# Altium PCB fastedge-ADCMP572.PcbDoc
Units mil, origin at the board's own origin, x right, y up, seen from the top; angles counter-clockwise.
Board outline 787.4 x 866.14 mil, 4 copper layers (L1, L2, L3, L4), stack 62.417 mil thick; 30 components, 17 nets, 105 pads, 140 vias.
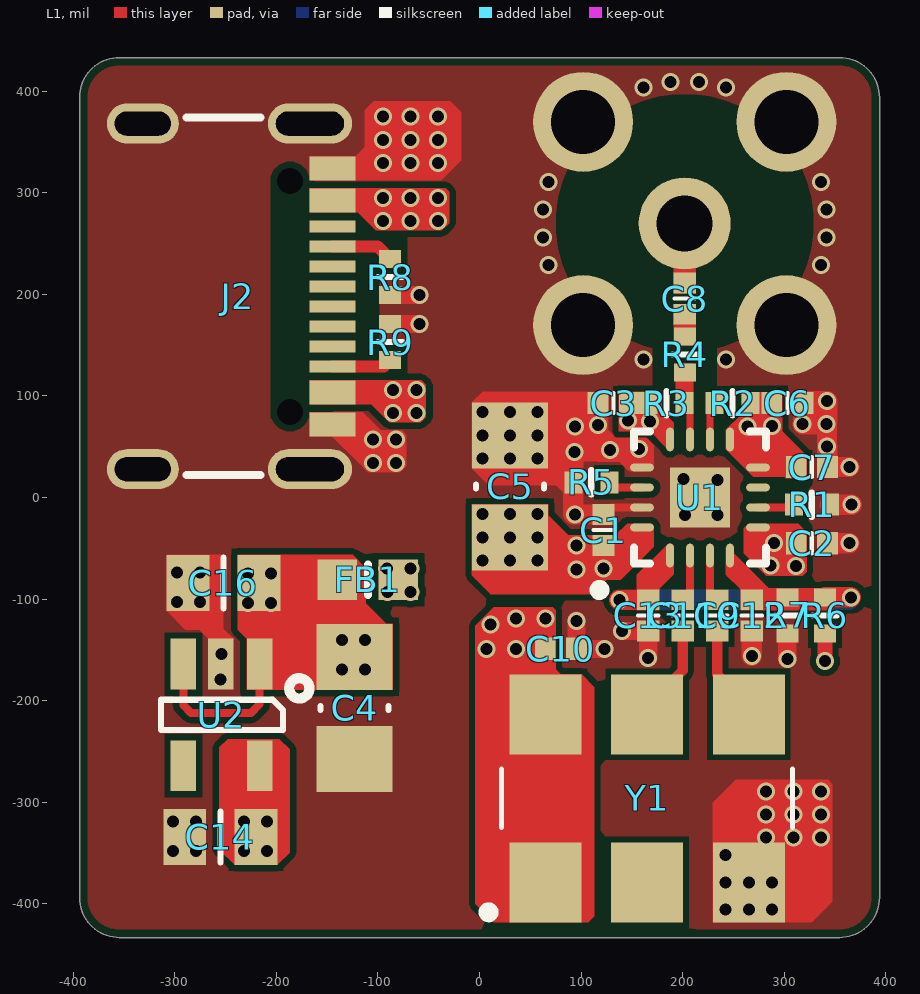
[diagram p0: L1 view]
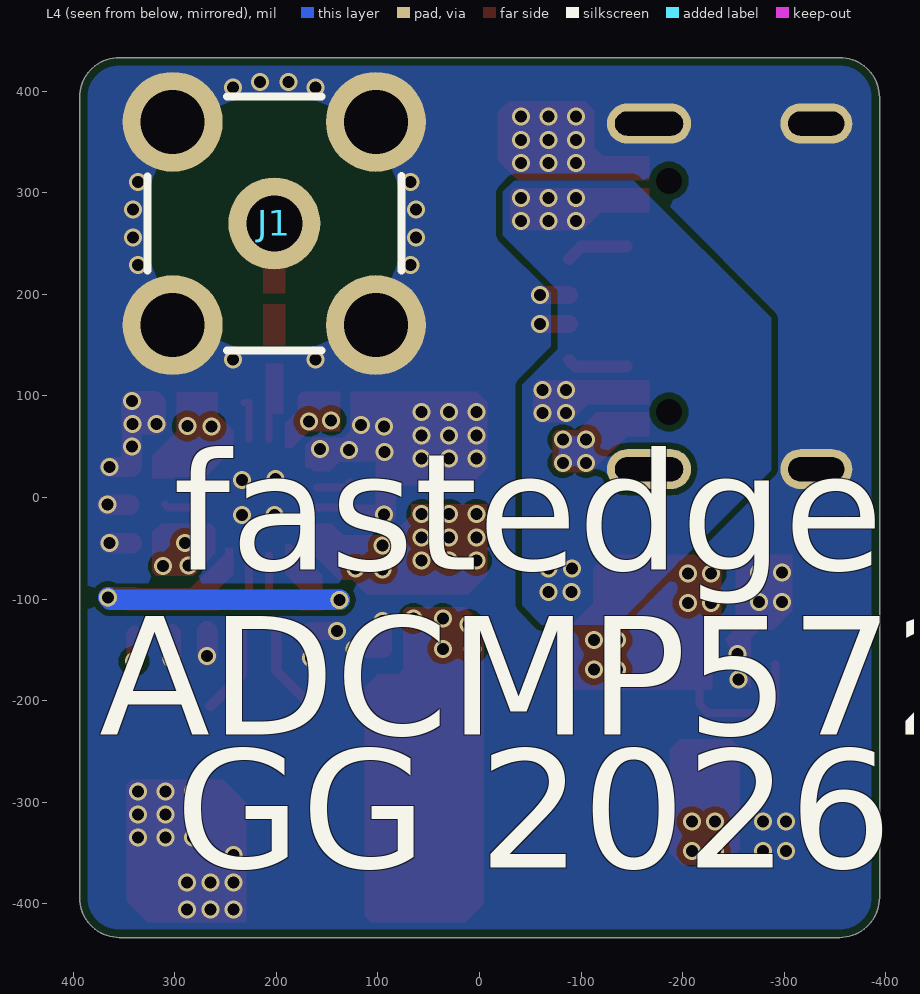
[diagram p1: L4 view, seen from below]
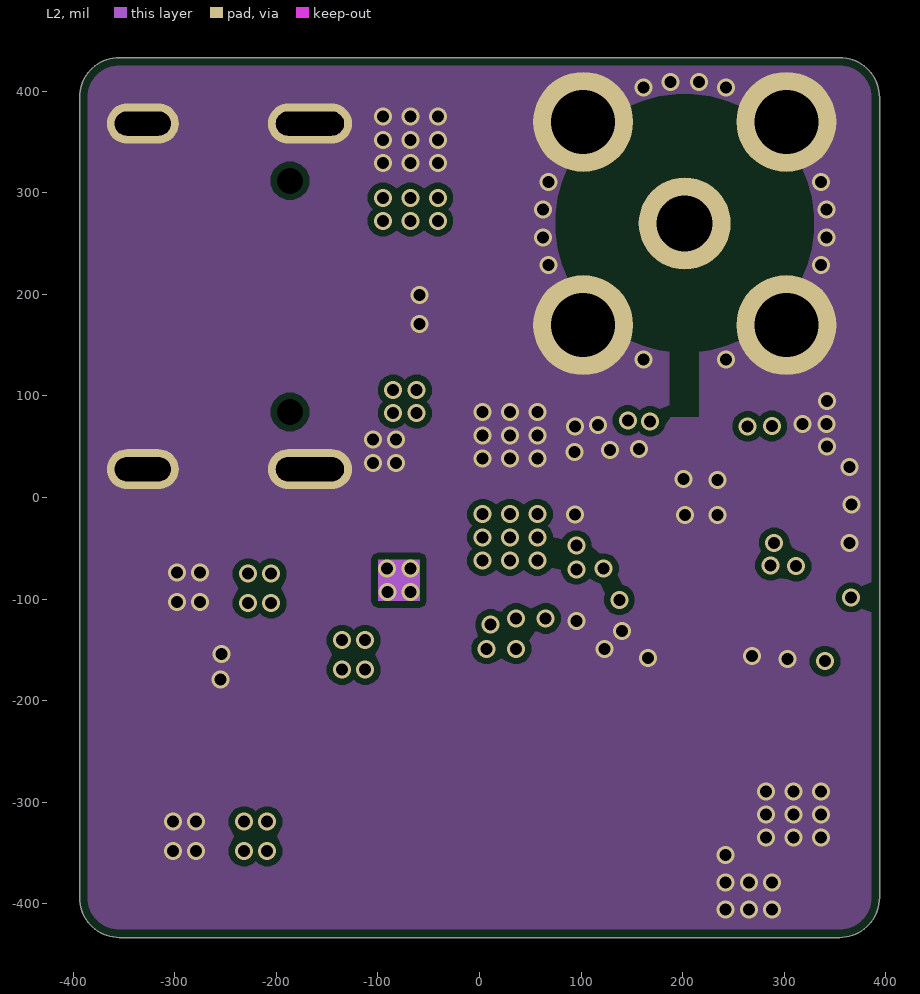
[diagram p2: L2]
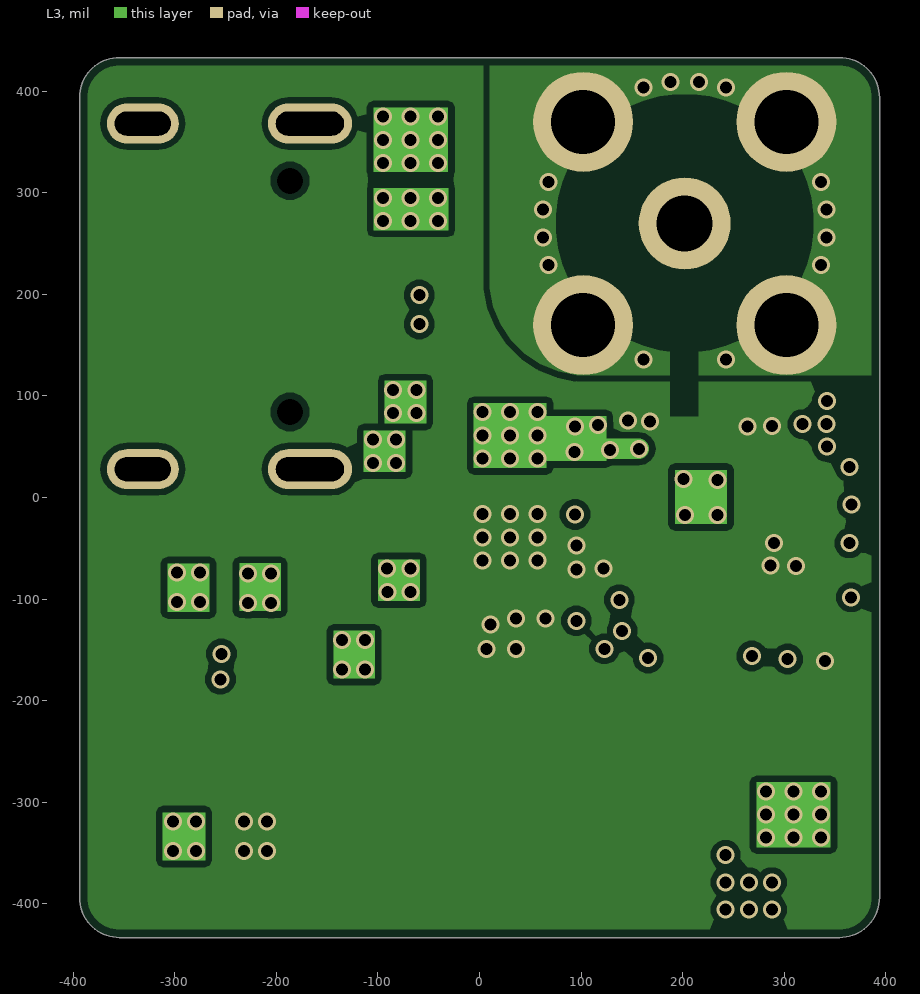
[diagram p3: L3]
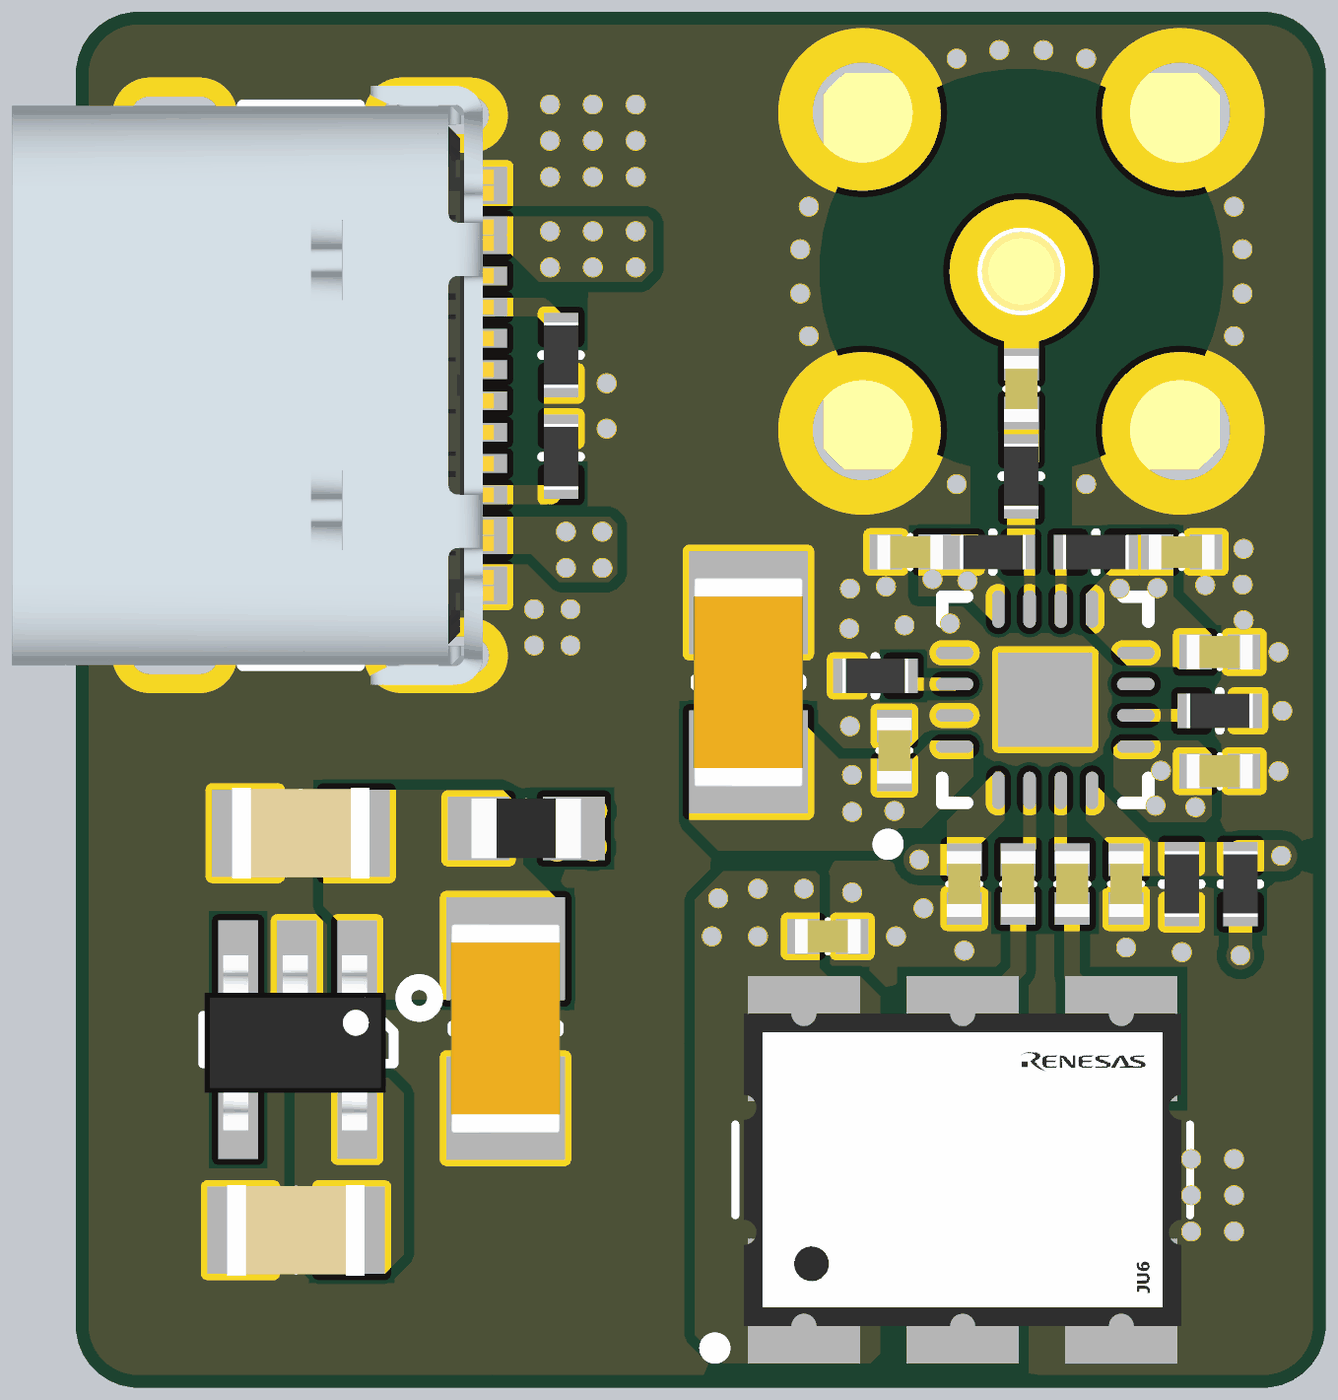
[diagram p4: 3D render of the assembled board from above, using the file's embedded part models]

## Layer stack, top to bottom
Top Solder: solder mask 0.4, Solder Resist, Dk 3.5
L1: signal copper 1.378
Dielectric 2: prepreg 8.2677, PP-006, Dk 4.1
L2: signal copper 0.5984
Dielectric 1: dielectric 41.9291, FR-4, Dk 4.8
L3: signal copper 0.5984
Dielectric 3: prepreg 8.2677, PP-006, Dk 4.1
L4: signal copper 1.378
Bottom Solder: solder mask 0.4, Solder Resist, Dk 3.5

## Board outline
-354.33,-433.07 cw(c-354.33,-393.7) -393.7,-393.7 -393.7,393.7 cw(c-354.33,393.7) -354.33,433.07 354.33,433.07 cw(c354.33,393.7) 393.7,393.7 393.7,-393.7 cw(c354.33,-393.7) 354.33,-433.07

## Design rules (kind name [scope] priority, off if disabled: settings)
BoardOutlineClearance [All] p1: gap=7.87 ignorepadtopadclearanceinfootprint=FALSE
Clearance [All] p1: gap=6 ignorepadtopadclearanceinfootprint=TRUE
HoleSize [All] p1: absolutevalues=TRUE maxlimit=157.48 minlimit=11.81 maxpercent=80.000 minpercent=20.000
MinimumAnnularRing [All] p1: minimumring=1.97
MinimumSolderMaskSliver [All] p1: minsoldermaskwidth=2
PlaneConnect [All] p1: planeconnectstyle=Direct reliefexpansion=20 reliefentries=4 reliefconductorwidth=10 reliefairgap=10
PolygonConnect VIA [IsVia] p1: connectstyle=Direct reliefconductorwidth=10 reliefentries=4 polygonreliefangle="90 Angle" airgapwidth=10
PolygonConnect [All] p2: connectstyle=Direct reliefconductorwidth=30 reliefentries=4 polygonreliefangle="90 Angle" airgapwidth=15
RoutingVias [All] p1: holewidth=11.81 width=17.72 viastyle="Through Hole" minholewidth=11.81 minwidth=17.72 maxholewidth=11.81 maxwidth=17.72
SilkToSilkClearance [All] p1: silktosilkclearance=1
SilkToSolderMaskClearance [IsPad] p1: minsilkscreentomaskgap=1 clearancetoexposedcopper=TRUE
SolderMaskExpansion [All] p1: expansion=4 istentingtop=FALSE
SupplyNets "Schematic Supply Nets_3" [InNet('+3.3V')] p1: voltage=0.000
SupplyNets "Schematic Supply Nets_2" [InNet('GND')] p2: voltage=0.000
SupplyNets "Schematic Supply Nets" [InNet('+5V')] p3: voltage=0.000
Width [All] p1: maxlimit=150 minlimit=7 preferedwidth=32 toplayer_prefwidth=10 midlayer1_minwidth=10 midlayer1_maxwidth=100 midlayer2_minwidth=10 midlayer2_maxwidth=100 bottomlayer_prefwidth=10 minimp=50.000000 maximp=50.000000 favimp=50.000000
25 further rules are at their usual default settings.

## Components (designator, comment, footprint, x,y, rotation, side; value= is the part's Value field where it differs from the comment)
C1 "Ceramic X7R" C_0402_1005 122,-32 r90 top value=100nF
C2 "Ceramic X7R" C_0402_1005 327,-45 r0 top value=100nF
C3 "Ceramic X7R" C_0402_1005 132,93 r180 top value=100nF
C4 "Ceramic X5R" C_1206_3216 -123,-207 r270 top value=47uF
C5 "Ceramic X5R" C_1206_3216 30,11 r90 top value=47uF
C6 "Ceramic X7R" C_0402_1005 303,93 r0 top value=100nF
C7 "Ceramic X7R" C_0402_1005 327,30 r0 top value=100nF
C8 "Ceramic X7R" C_0402_1005 202,195.72 r90 top value=100nF
C9 "Ceramic X7R" C_0402_1005 234,-116 r90 top value=100nF
C10 "Ceramic X7R" C_0402_1005 80,-149 r0 top value=100nF
C11 "Ceramic X7R" C_0402_1005 200,-116 r90 top value=100nF
C12 "Ceramic X5R" C_0402_1005 268,-116 r270 top value=10uF
C13 "Ceramic X7R" C_0402_1005 166,-116 r270 top value=100nF
C14 "Ceramic X5R" C_0805_2012 -255,-334 r180 top value=10uF
C16 "Ceramic X5R" C_0805_2012 -252,-84 r180 top value=10uF
FB1 "Ferrite bead" FB_0603_1608 -110,-81 r180 top value=120R@100M
J1 "SMA VERTICAL" J_SMA_VERTICAL 202,269.72 r180 bottom value=901-144-8RFX
J2 "USB 2.0 Type C" J_USB_C_629722000214 -247,198 r270 top locked value=629722000214
R1 "Resistor" R_0402_1005 327,-7 r180 top value=750R
R2 "Resistor" R_0402_1005 249,93 r0 top value=49.9R
R3 "Resistor" R_0402_1005 184,93 r180 top value=75R
R4 "Resistor" R_0402_1005 202,140.72 r90 top value=100R
R5 "Resistor" R_0402_1005 110,15 r180 top value=10k
R6 "Resistor" R_0402_1005 340,-116 r270 top value=5.6k
R7 "Resistor" R_0402_1005 303,-116 r90 top value=1k
R8 "Resistor" R_0402_1005 -88,217 r90 top value=5.1k
R9 "Resistor" R_0402_1005 -88,153 r270 top value=5.1k
U1 "ADCMP572BCPZ-WP" ADI-CP-16-3_L 217,0 r90 top
U2 "LDO Voltage Regulators 300-mA high-PSRR low -IQ low-dropout regu" SOT23-5_SC74A_SOT753_M -254,-214 r180 top value=TLV77333PDBVR
Y1 "XLL736005.000000X" JU6_MFG 165,-296 r90 top

## Footprints (in the part's own frame and the unit in brackets; to place one, negate y for a bottom-side part, rotate by r counter-clockwise, add the part's x,y. Pads: shape width x height; smd on the part's side, far side on the other; paste and mask are expansions set on the pad)
ADI-CP-16-3_L [mm] "QFN, 16-Leads, Body 3x3mm, Pitch 0.5mm, Thermal Pad 1.5x1.5mm, IPC High Density"
  oval 0.6x0.2 smd: 1(-1.45,0.75) 2(-1.45,0.25) 3(-1.45,-0.25) 4(-1.45,-0.75) 9(1.45,-0.75) 10(1.45,-0.25) 11(1.45,0.25) 12(1.45,0.75)
  oval 0.2x0.6 smd: 5(-0.75,-1.45) 6(-0.25,-1.45) 7(0.25,-1.45) 8(0.75,-1.45) 13(0.75,1.45) 14(0.25,1.45) 15(-0.25,1.45) 16(-0.75,1.45)
  rect 1.5x1.5 smd: 17(0,0)
  silkscreen extent -2.44,-1.65 1.65,2.64, body extent -1.5,-1.5 1.5,1.5, height 0.9
C_0402_1005 [mm]
  rect 0.52x0.56 smd: 1(-0.39,0) 2(0.39,0)
  silkscreen extent 0,-0.25 0,0.25, body extent -0.52,-0.27 0.53,0.28, height 0.55
C_0805_2012 [mil]
  rect 42x55 smd: 1(-35,0) 2(35,0)
  silkscreen extent 0,-25 0,25, body extent -43,-29 43,29, height 53
C_1206_3216 [mm] "Chip Capacitor, 2-Leads, Body 3.20x1.60mm, IPC Medium Density"
  rect 1.65x1.9 smd: 1(-1.275,0) 2(1.275,0)
  silkscreen extent -0.05,-0.85 0.05,0.85, body extent -1.68,-0.87 1.68,0.87, height 1.25
FB_0603_1608 [mil]
  rect 39x40 smd: 1(-30,0) 2(30,0)
  silkscreen extent 0,-15 0,15, body extent -34,-19 34,19, height 21
J_SMA_VERTICAL [mm]
  round 2.3 hole 1.4: 1(0,0)
  round 2.5 hole 1.6: GND(-2.54,-2.54) GND(-2.54,2.54) GND(2.54,-2.54) GND(2.54,2.54)
  silkscreen extent -3.17,-3.18 3.18,3.17, body extent -3.17,-3.17 3.18,3.18, height 9.5
J_USB_C_629722000214 [mm]
  rect 0.3x1.15 smd: A1(-3.35,2.6) A4(-2.55,2.6) A5(-1.25,2.6) A6(-0.25,2.6) A7(0.25,2.6) A8(1.25,2.6) A9(2.55,2.6) A12(3.35,2.6) B1(3.05,2.6) B4(2.25,2.6) B5(1.75,2.6) B6(0.75,2.6) B7(-0.75,2.6) B8(-1.75,2.6) B9(-2.25,2.6) B12(-3.05,2.6)
  round 0 hole 0.65 unplated: DNC(-2.89,1.535) DNC(2.89,1.535)
  oval 1x2.1 hole 0.6 slot 1.7 at 90 deg: MH(-4.32,2.035) MH(4.32,2.035)
  oval 1x1.8 hole 0.6 slot 1.4 at 90 deg: MH(-4.32,-2.145) MH(4.32,-2.145)
  silkscreen extent -4.47,-1.05 4.47,0.8, body extent -4.79,-4.74 4.79,2.97, height 3.26
JU6_MFG [mm] "Recommended Land Pattern"
  rect 2x1.8 smd paste+0 mask+0: 1(-2.1,2.54) 2(-2.1,0) 3(-2.1,-2.54) 4(2.1,-2.54) 5(2.1,0) 6(2.1,2.54)
  silkscreen extent -2.97,-3.64 0.72,4.09, body extent -2.5,-3.5 2.5,3.5, height 1.45
R_0402_1005 [mm] "Chip Resistor, 2-Leads, Body 1.00x0.50mm, IPC High Density"
  rect 0.45x0.55 smd: 1(-0.45,0) 2(0.45,0)
  silkscreen extent 0,-0.3 0,0.3, body extent -0.53,-0.28 0.53,0.28, height 0.37
SOT23-5_SC74A_SOT753_M [mil]
  rect 25x50 smd: 1(-37.5,-50) 2(0.5,-50) 3(37.5,-50) 4(37.5,50) 5(-37.5,50)
  silkscreen extent -87,-36 60,15, body extent -56,-53 59,57, height 57

## Part data
C1 C2 C3 C6 C7 C8 C9 C10 C11 C13: library part C_100nF_50V_X7R_0402_10, "Capacitor", Dielectric=X7R, Manufacturer=Murata, Manufacturer Part Number=GRM155R71H104KE14D, Tolerance (%)=10, Voltage=50V, HelpURL=http://docs-europe.electrocomponents.com/webdocs/145f/0900766b8145f9d2.pdf, Part Number=C_100nF_50V_X7R_0402_10, SCH_Footprint=0402, Supplier 1=TME, Supplier 2="RS Components", Supplier 3=Farnell, Supplier 4=Mouser, Supplier 5=Digi-Key, Supplier 6=LCSC, Supplier Part Number 1=GRM155R71H104KE14D, Supplier Part Number 2=8847087, Supplier Part Number 3=2611912, Supplier Part Number 4=81-GRM155R71H104KE4D, Supplier Part Number 5=490-10700-1-ND
C4 C5: library part C_47uF_25V_X5R_1206_20, "Capacitor", Dielectric=X5R, Manufacturer=TDK, Manufacturer Part Number=C3216X5R1E476M160AC, Supplier Part Number 1=C3216X5R1E476MAC, Tolerance (%)=20, Voltage=25V, HelpURL=https://product.tdk.com/system/files/dam/doc/product/capacitor/ceramic/mlcc/catalog/mlcc_commercial_general_en.pdf, Part Number=C_47uF_25V_X5R_1206_20, SCH_Footprint=1206, Supplier 1=TME, Supplier 2="RS Components", Supplier 3=Farnell, Supplier 4=Mouser, Supplier 5=Digi-Key, Supplier 6=LCSC, Supplier Part Number 2=7883060P, Supplier Part Number 3=2525172, Supplier Part Number 4=810-C3216X5R1E476M, Supplier Part Number 5=445-8047-1-ND
C12: library part C_10uF_10V_X5R_0402_20, "Capacitor", Dielectric=X5R, Manufacturer=Murata, Manufacturer Part Number=GRM155R61A106ME11D, Tolerance (%)=20, Voltage=10V, HelpURL=https://search.murata.co.jp/Ceramy/image/img/A01X/G101/ENG/GRM155R61A106ME11-01A.pdf, Part Number=C_10uF_10V_X5R_0402_20, SCH_Footprint=0402, Supplier 1=TME, Supplier 2="RS Components", Supplier 3=Farnell, Supplier 4=Mouser, Supplier 5=Digi-Key, Supplier 6=LCSC, Supplier Part Number 1=GRM155R61A106ME11D, Supplier Part Number 2=260-8765P, Supplier Part Number 3=3785802, Supplier Part Number 4=81-GRM155R61A106ME1D, Supplier Part Number 5=490-GRM155R61A106ME11DCT-ND, Supplier Part Number 6=C408132
C14 C16: library part C_10uF_10V_X5R_0805_10, "Capacitor", Dielectric=X5R, Manufacturer=Kemet, Manufacturer Part Number=C0805C106K8PACTU, Supplier Part Number 1=C0805C106K8PAC, Tolerance (%)=10, Voltage=10V, HelpURL=https://www.mouser.pl/datasheet/2/447/KEM_C1006_X5R_SMD-3316465.pdf, Part Number=C_10uF_10V_X5R_0805_10, SCH_Footprint=0805, Supplier 1=TME, Supplier 2="RS Components", Supplier 3=Farnell, Supplier 4=Mouser, Supplier 5=Digi-Key, Supplier 6=LCSC, Supplier Part Number 2=8029850, Supplier Part Number 3=1463362, Supplier Part Number 4=80-C0805C106K8P, Supplier Part Number 5=399-C0805C106K8PAC7800CT-ND
FB1: library part FB_BLM18AG121SH1D, "Ferrite Bead", Current=800mA, Manufacturer=Murata, Manufacturer Part Number=BLM18AG121SH1D, Resistance=180mR, HelpURL=https://www.murata.com/en-us/api/pdfdownloadapi?cate=cgsubChipFerriBead&partno=BLM18AG121SH1%23, Part Number=FB_BLM18AG121SH1D, SCH_Footprint=0603, Supplier 1=TME, Supplier 2="RS Components", Supplier 3=Farnell, Supplier 4=Mouser, Supplier 5=Digi-Key, Supplier 6=LCSC, Supplier Part Number 1=BLM18AG121SH1D, Supplier Part Number 3=2443234, Supplier Part Number 4=81-BLM18AG121SH1D, Supplier Part Number 5=490-11024-1-ND
J1: library part J_SMA_VERTICAL, "SMA connector", Manufacturer=Amphenol, Manufacturer Part Number=901-144-8RFX, HelpURL=http://www.mouser.com/ds/2/18/C901-144-8RFX-710432.pdf, Part Number=J_SMA_VERTICAL, SCH_Footprint="SMA VERTICAL", Supplier 1=TME, Supplier 2="RS Components", Supplier 3=Farnell, Supplier 4=Mouser, Supplier 5=Digi-Key, Supplier 6=LCSC, Supplier Part Number 1=901-144-8RFX, Supplier Part Number 2=1440894, Supplier Part Number 3=1339820, Supplier Part Number 4=523-901-144-8RFX, Supplier Part Number 5=ARFX1231-ND
J2: library part J_USB_C_629722000214, Manufacturer=Wurth, Manufacturer Part Number=629722000214, HelpURL=https://www.we-online.com/components/products/datasheet/629722000214.pdf, Part Number=J_USB_C_629722000214, SCH_Footprint=SMD, Supplier 1=TME, Supplier 2="RS Components", Supplier 3=Farnell, Supplier 4=Mouser, Supplier 5=Digi-Key, Supplier 6=LCSC, Supplier Part Number 3=4146212, Supplier Part Number 4=710-629722000214, Supplier Part Number 5=732-629722000214CT-ND
R1: library part R_750R_0402_1, Manufacturer=Panasonic, Manufacturer Part Number=ERJ-S02F7500X, Power=100mW, Tolerance=1%, Voltage=50V, HelpURL=https://industrial.panasonic.com/cdbs/www-data/pdf/RDP0000/AOA0000C334.pdf, Part Number=R_750R_0402_1, SCH_Footprint=0402, Supplier 1=TME, Supplier 2="RS Components", Supplier 3=Farnell, Supplier 4=Mouser, Supplier 5=Digi-Key, Supplier 6=LCSC, Supplier Part Number 3=3310159, Supplier Part Number 4=667-ERJ-S02F7500X, Supplier Part Number 5=ERJ-S02F7500X-ND, Supplier Part Number 6=C4025496
R2: library part R_49.9R_0402_1_AECQ0, Manufacturer=Panasonic, Manufacturer Part Number=ERJ-2RKF49R9X, Power=100mW, Supplier Part Number 1=ERJ2RKF49R9X, Tolerance=1%, Voltage=50V, AEC-Q=0, HelpURL=https://industrial.panasonic.com/cdbs/www-data/pdf/RDA0000/AOA0000C304.pdf, Part Number=R_49.9R_0402_1_AECQ0, SCH_Footprint=0402, Supplier 1=TME, Supplier 2="RS Components", Supplier 3=Farnell, Supplier 4=Mouser, Supplier 5=Digi-Key, Supplier 6=LCSC, Supplier Part Number 3=2059109, Supplier Part Number 4=667-ERJ-2RKF49R9X, Supplier Part Number 5=P49.9LCT-ND, Supplier Part Number 6=C441726
R3: library part R_75R_0402_1_AECQ0, Manufacturer=Panasonic, Manufacturer Part Number=ERJ-2RKF75R0X, Power=100mW, Supplier Part Number 1=ERJ2RKF75R0X, Tolerance=1%, Voltage=50V, AEC-Q=0, HelpURL=https://industrial.panasonic.com/cdbs/www-data/pdf/RDA0000/AOA0000C304.pdf, Part Number=R_75R_0402_1_AECQ0, SCH_Footprint=0402, Supplier 1=TME, Supplier 2="RS Components", Supplier 3=Farnell, Supplier 4=Mouser, Supplier 5=Digi-Key, Supplier 6=LCSC, Supplier Part Number 3=2059111, Supplier Part Number 4=667-ERJ-2RKF75R0X, Supplier Part Number 5=P75.0LCT-ND, Supplier Part Number 6=C413061
R4: library part R_100R_0402_1_AECQ0, Manufacturer=Panasonic, Manufacturer Part Number=ERJ-2RKF1000X, Power=100mW, Supplier Part Number 1=ERJ2RKF1000X, Tolerance=1%, Voltage=50V, AEC-Q=0, HelpURL=https://industrial.panasonic.com/cdbs/www-data/pdf/RDA0000/AOA0000C304.pdf, Part Number=R_100R_0402_1_AECQ0, SCH_Footprint=0402, Supplier 1=TME, Supplier 2="RS Components", Supplier 3=Farnell, Supplier 4=Mouser, Supplier 5=Digi-Key, Supplier 6=LCSC, Supplier Part Number 3=2302528, Supplier Part Number 4=667-ERJ-2RKF1000X, Supplier Part Number 5=P100LCT-ND
R5: library part R_10k_0402_1, Manufacturer=Yageo, Manufacturer Part Number=RC0402FR-0710KL, Power=63mW, Supplier Part Number 1=RC0402FR-0710K, Tolerance=1%, Voltage=50V, HelpURL=http://www.tme.eu/pl/Document/1a2bc76e2be68b3b1670068306778ce6/rc0402yageo.pdf, Part Number=R_10k_0402_1, SCH_Footprint=0402, Supplier 1=TME, Supplier 2="RS Components", Supplier 3=Farnell, Supplier 4=Mouser, Supplier 5=Digi-Key, Supplier 6=LCSC
R6: library part R_5.6k_0402_1, Manufacturer=Walsin, Manufacturer Part Number=WR04X5601FTL, Power=63mW, Tolerance=1%, Voltage=50V, HelpURL=https://datasheet.octopart.com/WR04X5601FTL-Walsin-Technologies-datasheet-48038251.pdf, Part Number=R_5.6k_0402_1, SCH_Footprint=0402, Supplier 1=TME, Supplier 2="RS Components", Supplier 3=Farnell, Supplier 4=Mouser, Supplier 5=Digi-Key, Supplier 6=LCSC, Supplier Part Number 3=2502556
R7: library part R_1k_0402_1, Manufacturer=Yageo, Manufacturer Part Number=RC0402FR-071K, Power=63mW, Tolerance=1%, Voltage=50V, HelpURL=http://www.tme.eu/pl/Document/1a2bc76e2be68b3b1670068306778ce6/rc0402yageo.pdf, Part Number=R_1k_0402_1, SCH_Footprint=0402, Supplier 1=TME, Supplier 2="RS Components", Supplier 3=Farnell, Supplier 4=Mouser, Supplier 5=Digi-Key, Supplier 6=LCSC, Supplier Part Number 1=RC0402FR-071K, Supplier Part Number 3=9239235, Supplier Part Number 4=603-RC0402FR-071KP, Supplier Part Number 5=311-1.00KLRCT-ND
R8 R9: library part R_5.1k_0402_1, Manufacturer=Yageo, Manufacturer Part Number=RC0402FR-075K1L, Power=63mW, Tolerance=1%, Voltage=50V, HelpURL=https://www.tme.eu/Document/92d375a0b5e7ae71098c0026a66a663c/RC0201FR-07100KL.PDF, Part Number=R_5.1k_0402_1, SCH_Footprint=0402, Supplier 1=TME, Supplier 2="RS Components", Supplier 3=Farnell, Supplier 4=Mouser, Supplier 5=Digi-Key, Supplier 6=LCSC, Supplier Part Number 1=RC0402FR-075K1L, Supplier Part Number 2=1987836, Supplier Part Number 3=1458805, Supplier Part Number 4=603-RC0402FR-075K1L, Supplier Part Number 5=311-5.10KLRCT-ND
U1: library part CMP-0783-00028-1, "Ultrafast Single-Supply SiGe Comparator, 3.3 to 5 V, 150 ps Delay, Industrial, 16-pin QFN (CP-16-3), Tray", Manufacturer="Analog Devices", Supply Current="3.3, 5", Voltage Supply (V)="3.3 to 5", Code_JEDEC=MO-220-VEED-2, ComponentLink1Description="Manufacturer URL", ComponentLink1URL=http://www.analog.com/en/index.html, ComponentLink2Description=Datasheet, ComponentLink2URL=http://www.analog.com/static/imported-files/data_sheets/ADCMP572_573.pdf, ComponentLink3Description="Package Specification", ComponentLink3URL=http://www.analog.com/static/imported-files/packages/PKG_PDF/LFCSP(CP)/CP_16_3.pdf, ComponentLink4Description="URL Link1", ComponentLink4URL="Product URL:http://www.analog.com/en/special-linear-functions/comparators/adcmp572/products/product.html", DatasheetVersion="Rev. A", Input Range (V)="-0.5 to VCCI+0.5", Mounting Technology="Surface Mount", PackageDescription="16-Pin Lead Frame Chip Scale Package, Body 3 x 3 mm, Pitch 0.5 mm", PackageReference=CP-16-3, Packing=Tray, PartNumber=ADCMP572BCPZ-WP
U2: library part VL_TLV77333PDBVR, "TPS7A25", Current=300mA, Manufacturer="Texas Instruments", Manufacturer Part Number=TLV77333PDBVR, Voltage=3.3V, HelpURL=https://www.ti.com/lit/ds/symlink/tlv773.pdf?ts=1737595386790, Part Number=VL_TLV77333PDBVR, SCH_Footprint=SOT23-5, Supplier 1=TME, Supplier 2="RS Components", Supplier 3=Farnell, Supplier 4=Mouser, Supplier 5=Digi-Key, Supplier 6=LCSC, Supplier Part Number 4=595-TLV77333PDBVR, Supplier Part Number 5=296-TLV77333PDBVRCT-ND
Y1: library part CMP-00572-106942813-3, "Renesas XL Family of Low Phase Noise Quartz-based PLL Oscillators", Case/Package=CLCC, Max Input Voltage=3.465V, Max Operating Temperature=70°C, Max Output Frequency=9.9MHz, Min Input Voltage=3.135V, Min Operating Temperature=-20°C, ComponentLink1Description="Manufacturer's Website", ComponentLink1URL=http://www.renesas.com, ComponentLink2Description="Datasheet URL", ComponentLink2URL=https://octopart.com/cad-content/api/get-model-datasheet/15189/106942813, ComponentLink3Description="Manufacturer's Package Drawing", ComponentLink3URL=https://www.renesas.com/en/document/psc/ju6-package-outline-70-x-50-mm-body-13-mm-thick, Height=1.45mm, HelpURL=https://octopart.com/cad-content/api/get-model-datasheet/15189/106942813, Mount="Surface Mount", Number of Pins=6, Output Type=LVDS, RoHS=Compliant

## Via types
v1: diameter 17.72, hole 11.81, L1 to L4, tented both sides, 126 vias
v2: diameter 17.72/17.72/17.72/17.72 (per signal layer), hole 11.81, L1 to L4, tented both sides, 14 vias

## Nets (pads, with @x,y where several pads share a name; then routed paths per layer and width w, separated by ;. In a path a pad name is that pad's centre, name@x,y a point inside that pad or via, vN(x,y) a via of type N, cw(c..) or ccw(c..) an arc to the next point about the centre after c; other vN are vias at no path point)
+3.3V: C1.1 C2.1 C3.1 C5.1 C6.1 C7.1 C10.1 C14.1 R2.2 R3.2 R6.2 U1.5 U1.8 U1.9 U1.12 U1.16 U2.5 Y1.1 Y1.6 | length 372.1
  L1 w14: v1(146,76) 147.35,77.35 C3.1 ; R3.2 166.28,76.72 v1(168,75) ; v1(264,70) 266.72,72.72 R2.2 ; v1(287.65,70.35) C6.1 ; v1(289.94,-44.67) 290.27,-45 C2.1 v1(311.65,-67.65)
  L1 w15: v1(340,-161) R6.2
  L1 w20: v1(36,-149) C10.1 64.65,-119.35 v1(65,-119) v1(36,-119) v1(36,-149) ; v1(95.35,-70.65) 121.35,-70.65 v1(122,-70) C1.1 v1(95.35,-47.35) v1(95.35,-70.65)
  other v1: -231.8,-348 -209,-348 -231.8,-319 -209,-319 7,-149 11,-125 286.48,-66.67 3,-62 30,-62 57,-62 3,-39.2 30,-39.2 57,-39.2 3,-16.39 30,-16.39 57,-16.39
+5V: C4.1 C16.1 FB1.2 U2.1 U2.3 | length 161.6
  L1 w8: U2.3 -291.5,-204.5 -284,-212 -225,-212 -216.5,-203.5 U2.1
  other v1: -135.3,-169.41 -112.49,-169.41 -135.3,-140.41 -112.49,-140.41 -227.8,-104 -205,-104 -227.8,-75 -205,-75
GND: C1.2 C2.2 C3.2 C4.2 C5.2 C6.2 C7.2 C10.2 C12.2 C13.2 C14.2 C16.2 J1.GND J2.A1 J2.A12 J2.B1 J2.B12 J2.MH R1.1 R5.2 R7.1 R8.1 R9.1 U1.13 U1.15 U1.17 U2.2 Y1.3 | length 823.7
  L1 w8: C1.2@125.07,-11.83 122,-14.9 C1.2 128.8,-9.84 U1.15 ; v1@127.67,50.65 148.79,29.53 U1.13@161.91,29.53
  L1 w18: R9.1 v1(-59.28,170.72) ; R8.1 v1(-59.28,199.28) ; v1(95.35,-121.35) C10.2 v1(123,-149) ; v1(140.35,-131.35) C13.2 v1(166,-158) ; R7.1 303,-158.81 v1(303.13,-158.95)
  L1 w20: v1(94,70) 92.28,68.28 93.51,67.06 v1(93.51,44.79) 92.28,43.57 92.28,-16.65 v1(94,-16.65) C1.2 ; 94,93 C3.2 v1(116.65,71.35) ; v1@98.46,67.54 102.28,71.35 v1(116.65,71.35) ; 116.65,56.96 v1(116.65,71.35) ; v1(268,-156) C12.2 ; C6.2@328.59,93 328.59,85.35 v1@340,73.94 ; v1@339.41,72.18 v1(317.84,72.18) 318.35,72.69 C6.2 ; C2.2 v1(364,-45) ; R1.1 v1(366.36,-7) ; v1(364,30) C7.2 342.35,49.5 341.93,49.93 v1(342,50) 342,73.59 342.35,73.94 342.35,94.65 v1(342,95) ; C6.2 320.35,95 v1(342,95) ; C6.2 341.75,93 342,93.25 v1(342,95)
  L3 w20: v1(94,70) ccw(c116,70) 116,48 v1(157,48)
  other v1: 242.2,-405.68 265,-405.68 287.8,-405.68 242.2,-378.68 265,-378.68 287.8,-378.68 242.2,-351.68 -301.8,-348 -279,-348 282,-334.8 309,-334.8 336,-334.8 -301.8,-319 -279,-319 282,-312 309,-312 336,-312 282,-289.2 309,-289.2 336,-289.2 -255,-179 -254,-154 -297.8,-103 -275,-103 -297.8,-74 -275,-74 202,-17 234,-17 234,17 201,18 -105,34.2 -82.05,34.2 3,38.39 30,38.39 57,38.39 128.4,46.85 -105,57 -82.05,57 3,61.2 30,61.2 57,61.2 341.41,72.53 3,84 30,84 57,84 -95,329.2 -68,329.2 -41,329.2 -95,352 -68,352 -41,352 -95,374.8 -68,374.8 -41,374.8
  other v2: 161.23,135.78 242.76,135.78 68.07,228.95 335.93,228.95 62.69,255.8 341.3,255.8 62.69,283.63 341.3,283.63 68.07,310.48 335.93,310.48 161.23,403.64 242.76,403.64 188.08,409.02 215.91,409.02
NetC8_1: C8.1 R4.2
NetC8_2: C8.2 J1.1
NetC9_1: C9.1 Y1.4 | length 86.8
  L1 w10: C9.1 234,-174.32 Y1.4@265,-205.32
NetC9_2: C9.2 U1.3 | length 46.1
  L1 w8: U1.3 226.84,-94.49 C9.2@233,-100.65
NetC11_1: C11.1 Y1.5 | length 88.5
  L1 w10: Y1.5@165,-205.32 200,-170.32 C11.1
NetC11_2: C11.2 U1.2 | length 46.5
  L1 w8: C11.2 207.16,-93.49 U1.2
NetFB1_1: FB1.1 J2.A4 J2.A9 J2.B4 J2.B9
  other v1: -90.68,-93.02 -67.94,-92.93 -91.05,-69.95 -67.8,-69.9 -84.95,83 -62,83 -84.95,105.8 -62,105.8 -95,272.2 -68,272.2 -41,272.2 -95,295 -68,295 -41,295
NetJ2_A5: J2.A5 R8.2 | length 61.8
  L1 w12: J2.A5 -100.5,247.21 R8.2
NetJ2_B5: J2.B5 R9.2 | length 59.2
  L1 w12: J2.B5 -94.18,129.1 R9.2
NetR1_2: R1.2 U1.6 | length 36.4
  L1 w8: U1.6 306.44,-9.84 R1.2
NetR2_1: R2.1 U1.10 | length 41.2
  L1 w7: U1.10@226.84,57.35 226.84,76.06 226.89,76.1 226.89,93.35 R2.1@232.09,93.35
NetR3_1: R3.1 R4.1 U1.11 | length 43.6
  L1 w7: R3.1@205.53,93.35 202.53,93.35 207.16,93.35 207.16,73.37 U1.11@207.16,57.35
NetR5_1: R5.1 U1.14 | length 37.4
  L1 w8: R5.1 127.72,9.84 U1.14
Vbias: C12.1 C13.1 R6.1 R7.2 U1.1 U1.4 | length 283.1
  L1 w20: v1(137.65,-100.65) C13.1 ; R6.1 v1(365.72,-98.28)
  L4 w20: v1(137.65,-100.65) 363.35,-100.65 v1(365.72,-98.28)
pads on no net: J2.A6 J2.A7 J2.A8 J2.B6 J2.B7 J2.B8 J2.DNC U1.7 U2.4 Y1.2

## Polygon pours and split planes (outlines as drawn)
GND on L4 "+5V" (solid, remove dead copper, pour order 3): -403,467 -403,-446 400,-446 400,467
NetFB1_1 on L4 "+5V" (solid, remove dead copper, pour order 2): -152,312 -287,177 -287,27 -135,-125 -61,-125 -42,-106 -42,111 -77,146 -77,204 -23,258 -23,301 -34,312
+3.3V on L3 "+3.3V" (solid, pour order 4): -442,446 -442,-446 428,-446 428,446
GND on L3 "GND_L3" (solid, remove dead copper, pour order 1): 105.06,120.5 cw(c105.06,215.57) 10,215.57 10,446 428,446 428,120.5
GND on L2 "CC" (solid, pour order 0): -419,452 415,452 415,-447 -419,-447
GND on L1 "GND_TOP" (solid, remove dead copper, pour order 5): -412,472 -412,-462 428,-462 428,472 118,472

## Other copper
L1:
  rectangle net GND: 82,35.42 126.88,104.02
  rectangle net NetR3_1: 192.86,82.17 210.57,131.86
  rectangle net NetC8_2: 190.98,200.83 213.02,269.71
  rectangle net NetC8_1: 190.98,149.57 213.02,190.6
  rectangle net +3.3V: 137.12,65 175.14,104.02
  rectangle net +3.3V: 95.35,-70 122,-47.35
  pour cut-out: 202,142.83 cw(c202,270) 74.83,270 cw(c202,270) 202,397.16 cw(c202,270) 329.17,270 cw(c202,270)
  region net +5V: -196,-56.5 -125,-56.5 -112,-69.5 -112,-104 -91.68,-124.32 -85.6,-124.32 -85.6,-189.28 -85.88,-189 -229,-189 -229,-139
  pour cut-out: -98.83,243.57 -98.83,123.2 -144.64,123.2 -144.64,247.21
  pour cut-out: -205.36,308.04 -205.36,77.92 -144.64,77.92 -144.64,298.39
  pour cut-out: 170.08,147.16 233.89,147.16 233.89,104.02 170.08,104.02
  region net GND: 114.27,69.37 101.67,56.76 101.67,50.65 116.89,35.42 140.58,35.42 149.26,26.74 171.72,29.53 171.72,51.28 164.24,58.76 134.24,58.76 123.63,69.37
  region net +3.3V: 137.12,65 168.18,65 183.96,49.21 191.41,49.21 191.41,73.38 179.14,85.65 179.14,99.83 174.94,104.02 137.12,104.02
  region net GND: -167.28,83.83 -114.83,83.83 -97,66 -76,66 -72,62 -72,31 -78,25 -110,25 -119,34 -145.2,60.2 -167.28,60.2
  region net +3.3V: -241,-361.5 -256,-346.5 -256,-246 -248,-238 -197,-238 -187,-248 -187,-349.5 -199,-361.5
  region net +3.3V: 14,-108 -4,-126 -4,-400 14.05,-418.05 106.95,-418.05 113,-412 113,-186.52 100.43,-173.95 79.98,-173.95 74.88,-168.86 74.88,-110.88 72,-108
  region net +3.3V: 133.77,-37.12 87.12,-37.12 67.4,-17.4 67.4,-6.72 -7.4,-6.72 -7.4,-76.6 11,-95 110.88,-95 133.02,-72.86 133.02,-47.35
  region net +3.3V: 313.5,-25.59 321.88,-33.98 321.88,-73.12 318,-77 282,-77 260,-55 260,-30.17 264.58,-25.59
  region net +3.3V: 321.88,18.98 301.41,18.98 299.71,20.68 269.49,20.68 242.59,47.58 242.59,66.59 257.86,81.86 257.86,103.83 297.88,104.02 297.88,65.12 321.88,41.12
  region net +3.3V: 145.3,-25.59 133.77,-37.12 110.98,-37.12 110.98,-80.78 139.22,-80.78 171.72,-48.28 171.72,-27.9 169.42,-25.59
  region net GND: -267,-189 -267,-139 -276,-130 -289.5,-130 -308,-111.5 -308,-56.5 -252,-56.5 -252,-129 -242,-139
  region net +5V: -238,-130 -229,-139 -229,-189 -186,-189 -176,-179 -176,-76.5 -196,-56.5 -238,-56.5
  region net NetFB1_1: -167.28,115.32 -57.27,115.32 -52.75,110.8 -52.75,79.25 -57.98,74.02 -89.02,74.02 -106.7,91.7 -167.28,91.7
  region net NetFB1_1: -167.28,304.3 -33.3,304.3 -30,301 -30,270 -37,263 -102,263 -119.68,280.68 -167.28,280.68
  region net GND: -167.28,312.17 -37.83,312.17 -18,332 -18,379 -29,390 -104,390 -113,381 -113,344.8 -122,335.8 -167.28,335.8
  region net GND: 343,-278 252,-278 229.57,-300.43 229.57,-418.05 326.95,-418.05 347,-398 347,-282
  region net GND: -7.4,28.72 9.31,12 75.6,12 83.42,4.17 101.67,22.42 101.67,56.76 126.88,81.98 126.88,104.02 2.94,104.02 -7.4,93.68
  region net Vbias: 191.41,-75.59 177.02,-89.98 177.02,-110.88 154.98,-110.88 154.98,-76.02 185.72,-45.28 189.1,-45.28 191.41,-47.58
  region net Vbias: 250.46,-49.21 250.46,-55.1 284.79,-89.43 350.83,-89.43 350.83,-107.14 347.09,-110.88 256.98,-110.88 256.98,-90.41 242.59,-76.02 242.59,-49.21
L2:
  rectangle net NetFB1_1: -100.04,-101.97 -58.69,-60.86
  pour cut-out: 202,142.83 cw(c202,270) 74.83,270 cw(c202,270) 202,397.16 cw(c202,270) 329.17,270 cw(c202,270)
  pour cut-out: 187.12,149.57 187.12,79.55 192.85,79.55 215.72,79.55 215.72,149.57
L3:
  rectangle net NetFB1_1: -100.04,-101.97 -58.69,-60.86
  rectangle net +5V: -143.81,-178.14 -103.1,-131.09
  rectangle net NetFB1_1: -93.37,72.95 -52.37,115.02
  rectangle net GND: -114.04,25.03 -72.69,66.14
  rectangle net NetFB1_1: -104.19,262.96 -30.65,304.51
  rectangle net GND: -104.41,320.35 -30.97,383.91
  rectangle net GND: 272.6,-344.23 345.53,-280.18
  rectangle net GND: -311.79,-357.22 -269.93,-309.79
  rectangle net GND: -307.06,-112.87 -265.54,-64.92
  rectangle net +5V: -236.31,-111.73 -195.61,-64.68
  rectangle net GND: 192.33,-26.19 243.62,27.19
  rectangle net GND: 58.76,35.93 124.84,80.04
  rectangle net GND: -5.71,29.03 66.08,92.9
  pour cut-out: 202,142.83 cw(c202,270) 74.83,270 cw(c202,270) 202,397.16 cw(c202,270) 329.17,270 cw(c202,270)
  pour cut-out: 187.12,149.57 187.12,79.55 192.85,79.55 215.72,79.55 215.72,149.57
L4:
  pour cut-out: 202,142.83 cw(c202,270) 74.83,270 cw(c202,270) 202,397.16 cw(c202,270) 329.17,270 cw(c202,270)

## Silkscreen, mask and mechanical layers (free items; w line width, h text height)
Bottom Overlay:
  text "fastedge" at 301.46,-109.5 h200
  text "ADCMP572" at 374.3,-272.06 h200
  text "GG 2026" at 299.33,-402.91 h200
Mechanical 1:
  the board outline again, w10